# Altium PCB PCB1.PcbDoc (part 2 of 3)
Units mil, origin at the board's own origin, x right, y up, seen from the top; angles counter-clockwise.
Board outline 3631 x 2044 mil, 4 copper layers (Top Layer, GND1, GND2, Bottom Layer), stack 62.449 mil thick; 138 components, 90 nets, 471 pads, 514 vias.
Unrouted connection lines stored in the file: 16.
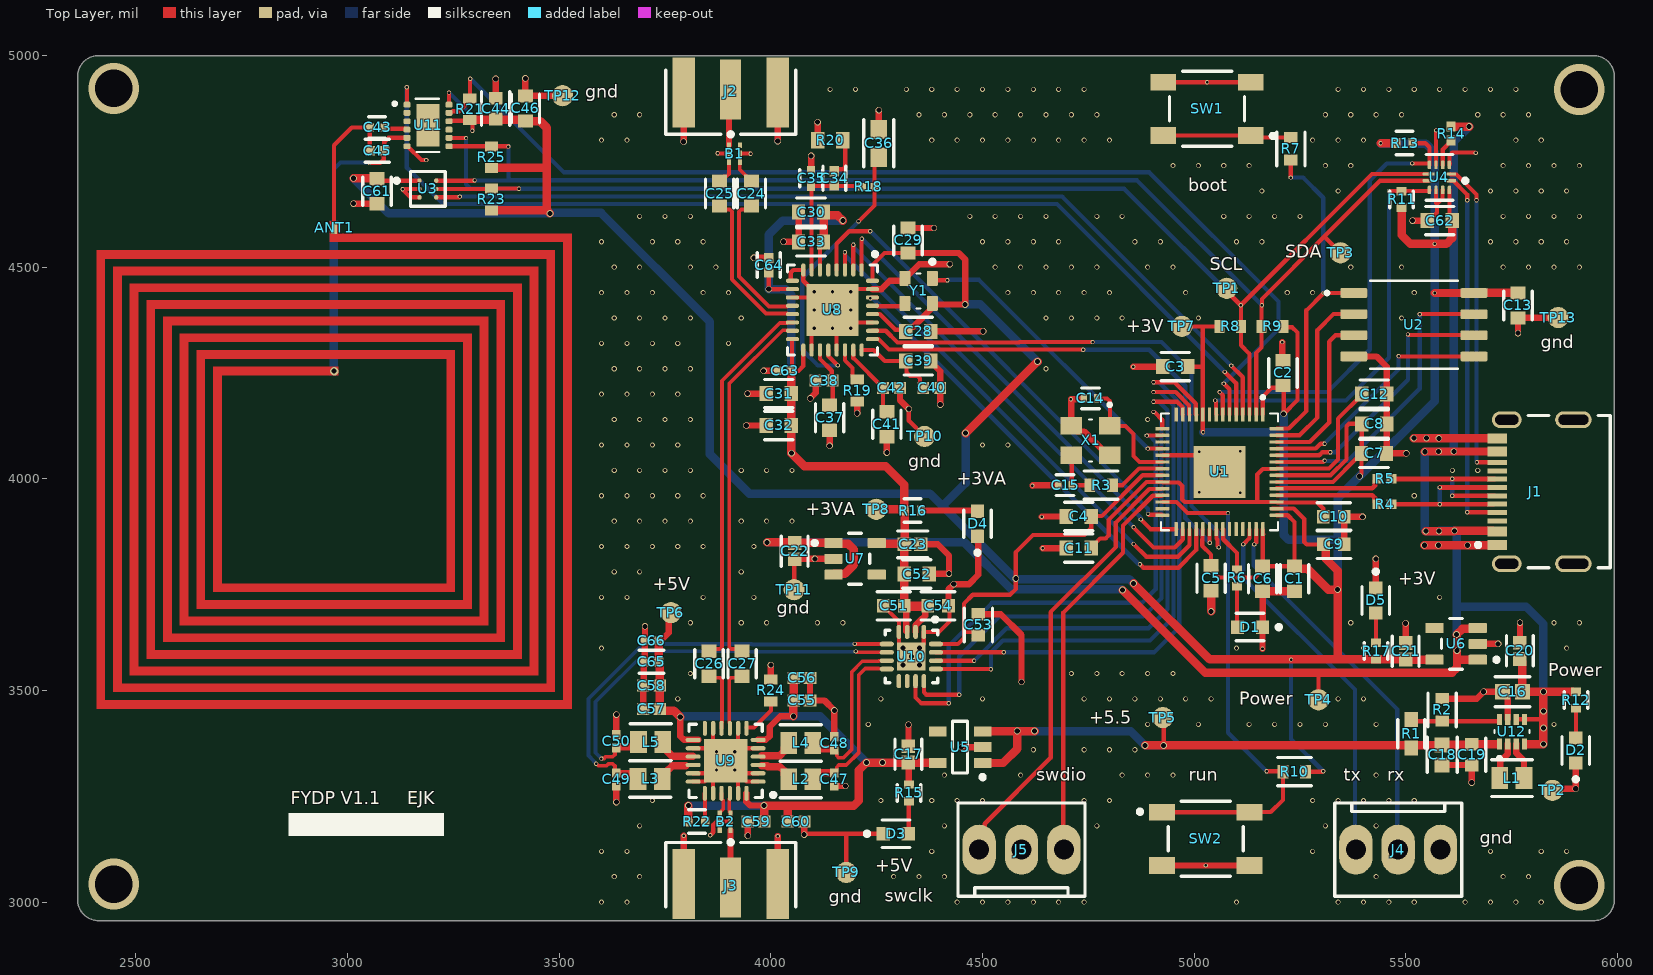
[diagram p0: Top Layer view]

## Via types
v1: diameter 12, hole 8, Top Layer to Bottom Layer, 299 vias
v2: diameter 10, hole 6, Top Layer to Bottom Layer, 100 vias
v3: diameter 15, hole 12, Top Layer to Bottom Layer, 60 vias
v4: diameter 16, hole 12, Top Layer to Bottom Layer, 32 vias
v5: diameter 19.68, hole 7.87, Top Layer to Bottom Layer, 13 vias
v6: diameter 19.68, hole 11.81, Top Layer to Bottom Layer, 5 vias
v7: diameter 120, hole 88, Top Layer to Bottom Layer, 4 vias
v8: diameter 20, hole 12, Top Layer to Bottom Layer, 1 vias

## Nets (pads, with @x,y where several pads share a name; then routed paths per layer and width w, separated by ;. In a path a pad name is that pad's centre, name@x,y a point inside that pad or via, vN(x,y) a via of type N, cw(c..) or ccw(c..) an arc to the next point about the centre after c; other vN are vias at no path point) (continued)
+3V3: (continued)
  Top Layer w10: C61.1@3069.37,4709.06 3074.06,4704.37 U3.A1@3170,4704.37 ; U11.10@3239.61,4844.84 3240.89,4846.13 3289.47,4846.13 3295,4840.6 v2(3295,4822) ; U11.12@3239.61,4884.21 v2(3239.61,4912.39) ; R21.2@3289,4847.41 R21.2@3292.94,4847.41 ; U8.28@4240,4389.06 4257.3,4389.06 4294.01,4352.35 4317.03,4352.35 C28.1@4318.9,4350.48 ; U8.32@4240,4467.8 4240,4505 4268.47,4533.47 C29.1@4324,4533.47 ; U10.16@4390,3609.68 4441.69,3609.68 4456,3624 4456,3641 ; C53.1@4479.01,3621.92 4482.33,3625.24 C53.1@4482.33,3637.99 ; C53.1@4490,3630.32 C53.1@4482.33,3637.99 ; U1.22@4924.65,4008.36 4878.36,4008.36 4781.95,3911.95 4758,3911.95 C4.1@4757.06,3911 4757.06,3883.06 4741,3867 4619,3867 4578.76,3826.76 v4(4578.76,3764.68) 4578.76,3739.76 4565,3726 4477,3726 4456,3705 4456,3641 ; TP7.1@4971,4360 R8.2@5059.41,4360 ; C3.1@4984.53,4265 5020.51,4265 ; U1.33@5020.51,3881 5019.45,3879.94 5019.45,3856.68 5019.16,3856.39 5019.16,3841.61 5040,3820.77 C5.1@5040,3794.53 5041.97,3794.53 5052.72,3783.78 5052.72,3772.7 5058.57,3766.84 5143.43,3766.84 5149.28,3772.7 5149.28,3782.78 5160.03,3793.53 C6.1@5162,3793.53 ; 5020.51,4360 5020.51,4265 ; v2(5021,4110) 5020.51,4110.49 U1.10@5020.51,4151.47 5020.51,4265 ; U1.42@5162.24,3869.46 5162.24,3793.77 C6.1@5162,3793.53 ; U1.42@5162.24,3881 5162.24,3870.53 U1.42@5163.53,3869.24 ; U1.1@5162.24,4151.47 5162.24,4194.24 5183.14,4215.14 5204.67,4215.14 C2.1@5210,4220.47 5211.52,4218.95 v4(5211.52,4153.52) 5244,4186 5244,4345.57 5231.54,4358.03 5212.56,4358.03 R9.2@5210.59,4360 ; U1.44@5184.65,3929.62 U1.44@5195.12,3929.62 5235.38,3929.62 5260,3905 5260,3850.86 5265.86,3845 C9.1@5305.63,3845 ; U1.43@5195.12,3913.87 5221.13,3913.87 5237,3898 C1.1@5237,3793.53 C6.1@5162,3793.53 ; U1.48@5195.12,3992.61 5328.09,3992.61 5382.76,4047.28 5384.72,4047.28 5395.94,4058.5 C8.1@5395.94,4130 5365.86,4130 5360,4124.14 5360,4046 5322.36,4008.36 U1.49@5195.12,4008.36 ; R10.2@5263.28,3308 5304,3308 v2(5305,3309) ; v4(5391,4006) 5391,4007.62 5395.47,4012.1 C7.1@5395.47,4060 ; U4.12@5603.03,4682.6 5603.03,4616.5 C62.1@5609.53,4610 ; 4456,3641 4459.01,3637.99 C53.1@4482.33,3637.99
  Top Layer w15: C28.1@4318.9,4350.48 4327.15,4358.73 4336.04,4358.73 4381.38,4404.06 4381.38,4408.98 4384.2,4411.81 4458.81,4411.81 v4(4459,4412) 4459,4518 4443.53,4533.47 C29.1@4324,4533.47
  Top Layer w20: v4(3014,4710) 3068.43,4710 C61.1@3069.37,4709.06 ; R21.2@3289,4847.41 3290.3,4848.7 3348.7,4848.7 C44.1@3350,4850 3352.26,4847.74 3417.74,4847.74 3420.68,4844.79 3455.21,4844.79 3470.59,4829.41 3470.59,4634.41 ; R23.2@3340,4634.41 3470.59,4634.41 ; R25.2@3340,4734.41 3468.59,4734.41 3470.59,4732.41 ; v4(3478,4627) 3470.59,4634.41 ; v4(4460,4108) 4461,4108 v4(4630,4277) ; v4(4857,3753) 5036.39,3573.61 5229,3573.61 5339,3573.61 ; C1.1@5237,3793.53 5242.75,3787.78 5267.22,3787.78 5317,3738 v4(5339,3738) ; C9.1@5305.63,3845 5310.55,3840.08 5310.55,3811.45 5339,3783 v4(5339,3738) ; v2(5440.31,4793) R13.2@5477.31,4793 ; R11.2@5490,4640.31 5490,4576 5511,4555 v2(5568,4555) 5596,4555 5609.53,4568.53 C62.1@5609.53,4610 ; C21.1@5499.37,3573.61 5500.03,3572.95 5567.29,3572.95 U6.5@5567.64,3572.6 ; C21.1@5499.69,3573.29 5431.65,3573.29 5431.34,3573.61 5429.69,3573.61 5339,3573.61 ; v2(5568,4439) U2.8@5661.11,4439.05 U2.8@5661.11,4439.05 C13.1@5765,4439.06 ; 5339,3573.61 v4(5339,3738)
  Bottom Layer w10: v2(3239.61,4912.39) 3295,4857 v2(3295,4822) ; v2(5229,3573) 5229,3385 v2(5305,3309)
  Bottom Layer w20: v4(3014,4710) 3097,4627 v4(3478,4627) 3479.16,4628.16 3598.84,4628.16 3856,4371 3856,4058 3949,3965 4375.84,3965 4405.42,3935.42 ; v4(4459,4412) 4495,4412 v4(4630,4277) ; v4(4460,4108) 4460,3990 4405.42,3935.42 ; v4@4578.76,3762.84 4847.16,3762.84 v4(4857,3753) ; v4(4578.76,3764.68) 4576.16,3764.68 4405.42,3935.42 ; v2(5021,4110) 5211.52,4110.02 ; v4(5211.52,4153.52) 5211.52,4110.02 ; v4(5339,3738) 5339,3855.48 ; v2(5440.31,4793) 5441.31,4792 5547,4792 5568,4771 v2(5568,4555) v2(5568,4439) 5568,4183 v4(5391,4006) 5339,3954 5339,3855.48 ; 5211.52,4110.02 5211.52,3867.2 5223.24,3855.48 5339,3855.48